# Altium PCB SFCmasterD.PcbDoc (part 3 of 7)
Units mm, origin at the board's own origin, x right, y up, seen from the top; angles counter-clockwise.
Board outline 152.4 x 101.6 mm, 2 copper layers (Top Layer, Bottom Layer); 249 components, 250 nets, 987 pads, 265 vias.
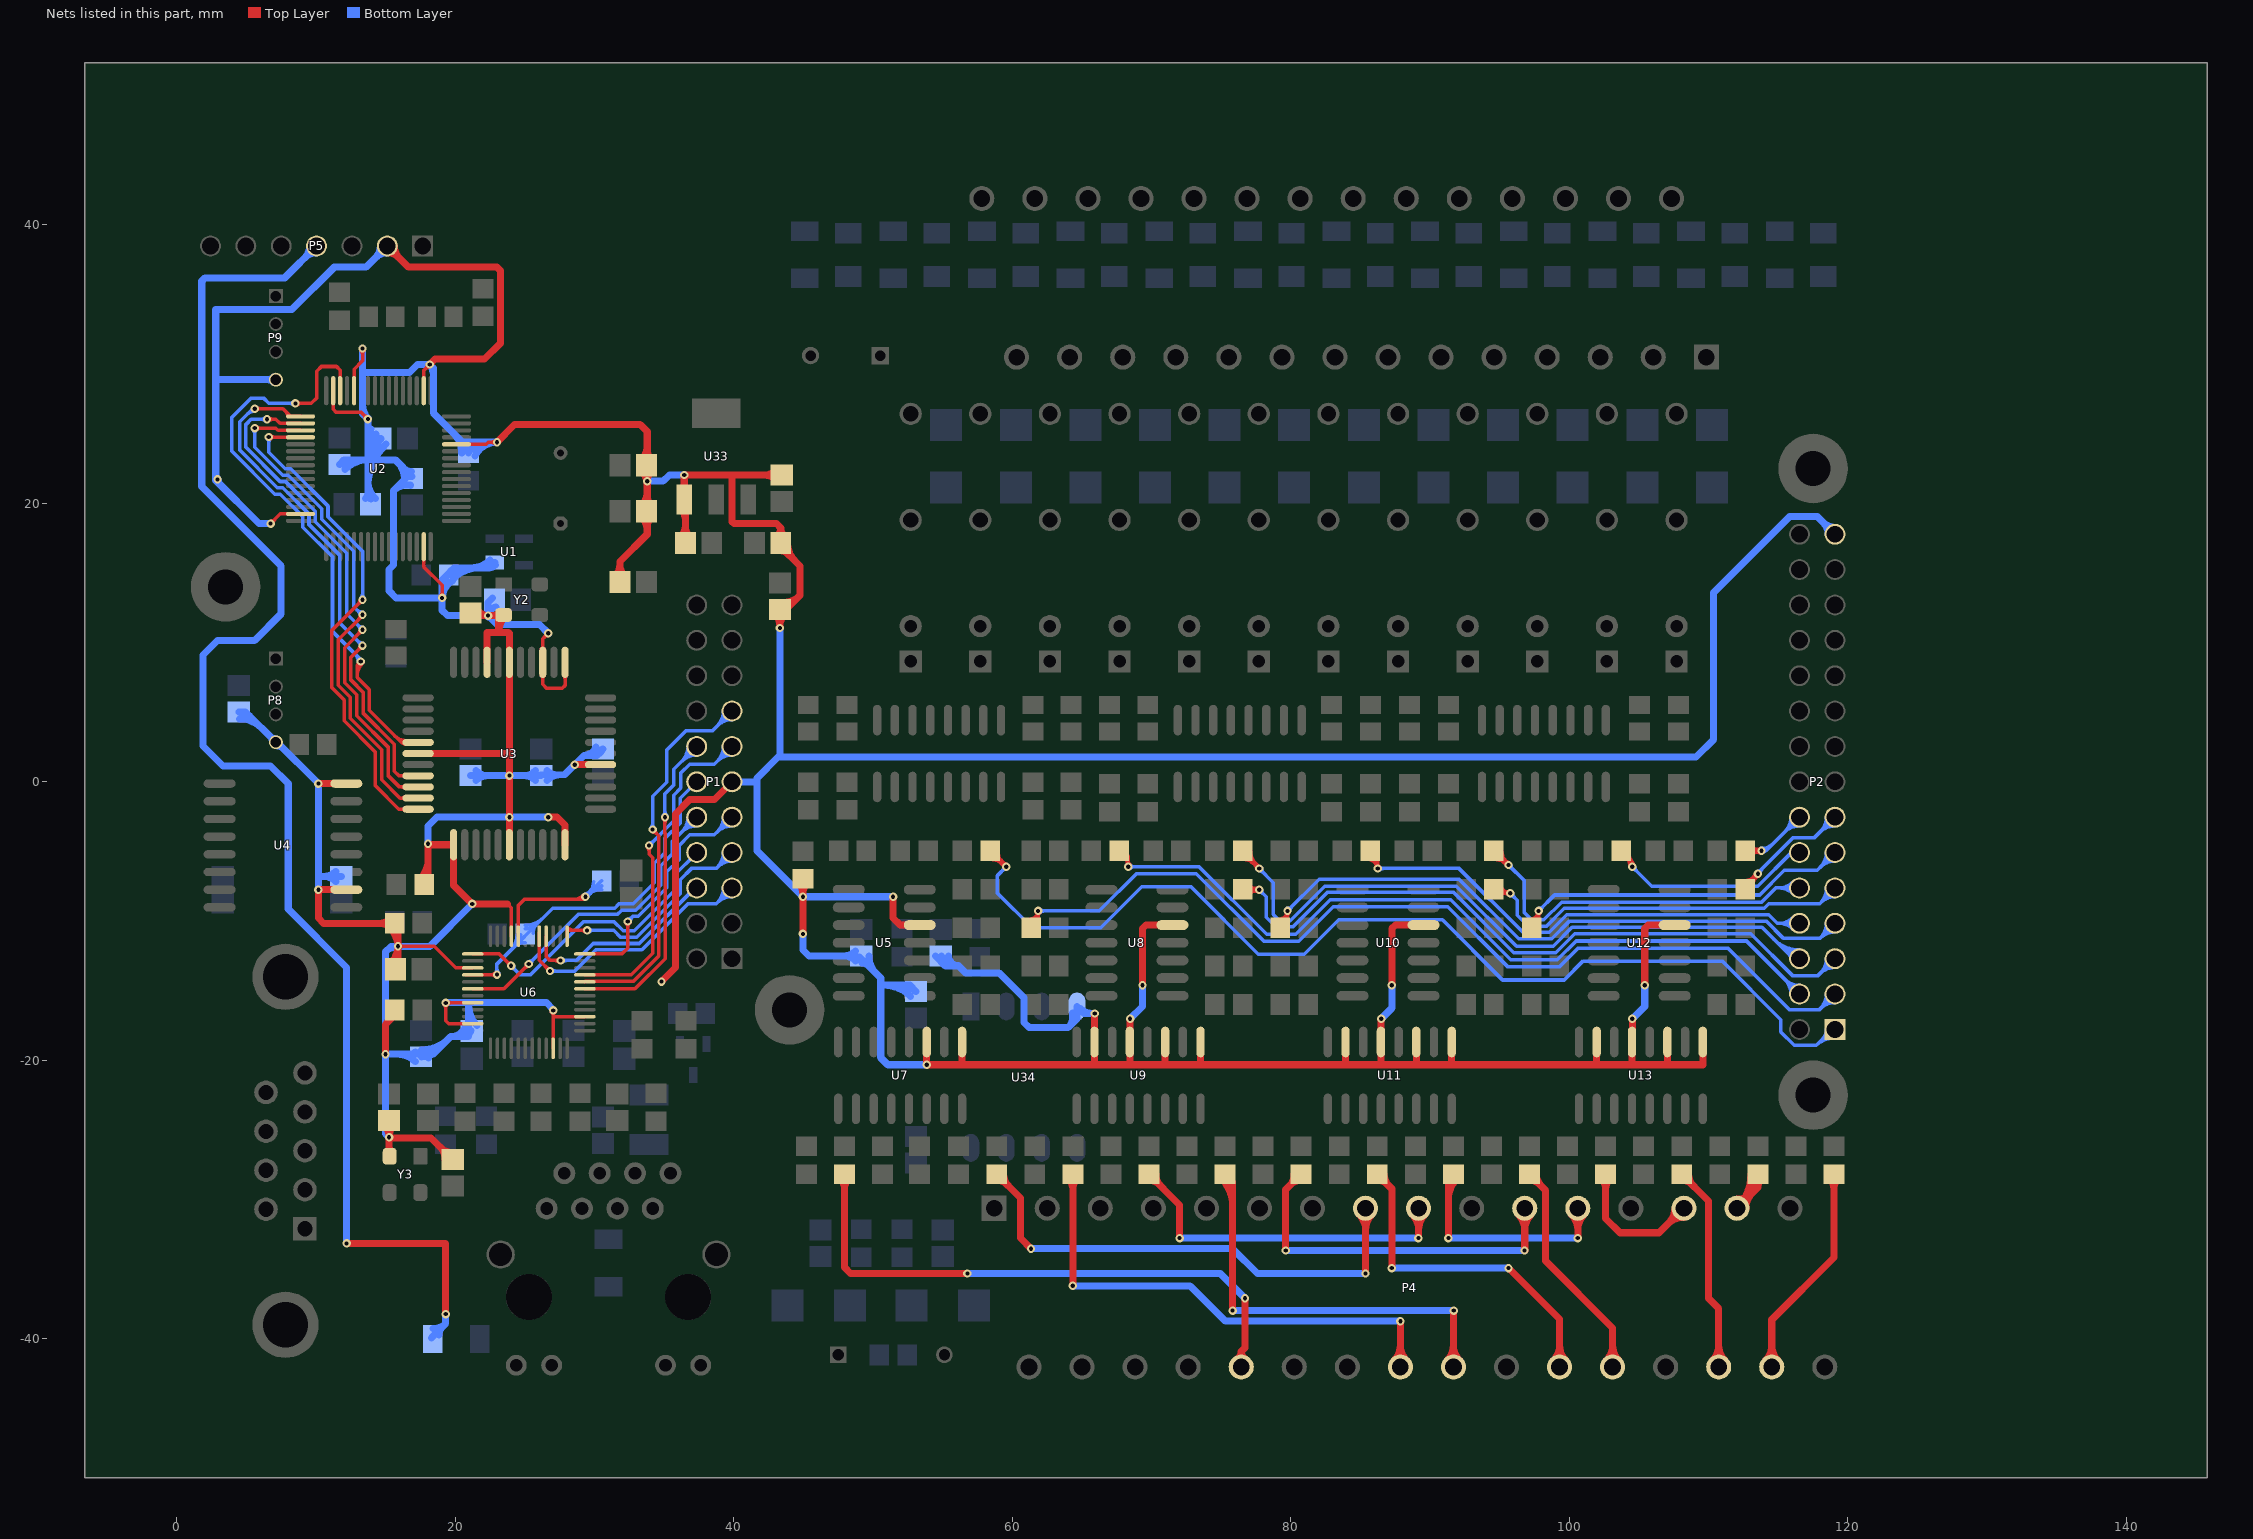
[diagram p3: the nets of this part, all layers, seen from the top]

## Via types
v1: diameter 0.6, hole 0.3, Top Layer to Bottom Layer, 265 vias

## Nets (pads, with @x,y where several pads share a name; then routed paths per layer and width w, separated by ;. In a path a pad name is that pad's centre, name@x,y a point inside that pad or via, vN(x,y) a via of type N, cw(c..) or ccw(c..) an arc to the next point about the centre after c; other vN are vias at no path point) (continued)
DB3: U2.30 U3.16 | length 48.2
  Top Layer w0.254: v1(8.509,27.178) 9.652,27.178 10.033,27.559 10.033,29.474 10.385,29.826 11.458,29.826 11.728,29.556 U2.30@11.728,28.088 ; v1@8.631,27.056 cw(c8.927,26.76) 8.927,27.178 cw(c8.927,27.596) v1@8.631,27.3 ; 12.954,7.605 cw(c14.239,7.605) v1@13.33,8.514 ; 12.954,8.218 cw(c13.626,8.218) v1@13.151,8.693 ; v1@13.036,8.617 cw(c12.752,8.585) 12.954,8.382 ; v1@13.189,8.464 ccw(c13.157,8.18) 12.954,8.382 ; v1(13.208,8.636) 12.954,8.382 ; 15.665,3.286 ccw(c16.455,4.076) U3.16@16.455,2.959 ; 16.099,2.853 ccw(c16.455,3.209) U3.16@16.455,2.705 ; U3.16@16.365,2.742 ccw(c16.148,2.525) 16.148,2.832 ccw(c16.148,3.139) U3.16@16.365,2.922 ; U3.16@17.326,2.832 16.119,2.832 13.824,5.127 13.824,6.625 12.954,7.495 12.954,8.382
  Bottom Layer w0.254: v1@8.387,27.056 ccw(c8.091,26.76) 8.091,27.178 ccw(c8.091,27.596) v1@8.387,27.3 ; v1(8.509,27.178) 6.604,27.178 6.223,27.559 5.334,27.559 3.937,26.162 3.937,23.754 7.033,20.658 7.428,20.658 9.036,19.05 9.036,18.29 11.176,16.15 11.176,10.795 13.335,8.636 v1(13.208,8.636) ; 12.823,9.148 cw(c12.311,8.636) v1@13.035,8.636
DB4: U2.33 U3.19 | length 40.9
  Top Layer w0.254: v1(5.588,26.797) 7.62,26.797 8.128,26.289 8.128,26.238 U2.33@8.878,26.238 ; v1@5.71,26.675 cw(c6.006,26.379) 6.006,26.797 cw(c6.006,27.215) v1@5.71,26.919 ; 7.797,26.62 cw(c7.415,26.238) U2.33@7.955,26.238 ; v1@13.162,9.779 cw(c12.744,9.779) 13.04,9.484 cw(c13.335,9.188) v1@13.335,9.606 ; v1(13.335,9.779) 12.5,8.944 12.5,7.307 13.37,6.437 13.37,4.939 15.621,2.688 15.621,0.762 15.951,0.432 U3.19@17.326,0.432 ; U3.19@16.365,0.342 ccw(c16.148,0.125) 16.148,0.432 ccw(c16.148,0.739) U3.19@16.365,0.522
  Bottom Layer w0.254: 5.068,26.409 cw(c5.588,25.888) v1@5.588,26.624 ; v1(5.588,26.797) 5.456,26.797 4.507,25.848 4.507,23.826 7.221,21.112 7.616,21.112 9.49,19.238 9.49,18.478 11.684,16.284 11.684,11.43 v1(13.335,9.779) ; v1@13.162,9.779 ccw(c12.744,9.779) 13.04,10.074 ccw(c13.335,10.37) v1@13.335,9.952
DB5: U2.34 U3.20 | length 40.5
  Top Layer w0.254: v1(6.477,26.035) 7.112,26.035 7.409,25.738 U2.34@8.878,25.738 ; v1@6.599,25.913 cw(c6.895,25.617) 6.895,26.035 cw(c6.895,26.453) v1@6.599,26.157 ; v1@13.162,10.922 cw(c12.744,10.922) 13.04,10.627 cw(c13.335,10.331) v1@13.335,10.749 ; v1(13.335,10.922) 12.046,9.633 12.046,7.119 12.916,6.249 12.916,4.751 15.167,2.5 15.167,0.454 15.989,-0.368 U3.20@17.326,-0.368 ; U3.20@16.365,-0.458 ccw(c16.148,-0.675) 16.148,-0.368 ccw(c16.148,-0.061) U3.20@16.365,-0.278
  Bottom Layer w0.254: v1@6.355,25.913 ccw(c6.059,25.617) 6.059,26.035 ccw(c6.059,26.453) v1@6.355,26.157 ; v1(6.477,26.035) 5.353,26.035 5.345,26.027 5.328,26.027 4.961,25.66 4.961,24.014 7.409,21.566 7.804,21.566 9.944,19.426 9.944,18.666 12.192,16.418 12.192,12.065 v1(13.335,10.922) ; v1@13.162,10.922 ccw(c12.744,10.922) 13.04,11.217 ccw(c13.335,11.513) v1@13.335,11.095
DB6: U2.35 U3.21 | length 40.4
  Top Layer w0.254: v1(5.588,25.4) 7.105,25.4 7.267,25.238 U2.35@8.878,25.238 ; v1@5.71,25.278 cw(c6.006,24.982) 6.006,25.4 cw(c6.006,25.818) v1@5.71,25.522 ; 12.995,11.598 ccw(c12.591,12.002) v1@13.162,12.002 ; 13.148,11.751 cw(c13.335,11.564) v1@13.335,11.829 ; v1(13.335,12.002) 13.335,11.938 11.592,10.195 11.592,6.931 12.462,6.061 12.462,4.563 14.713,2.312 14.713,0.146 16.027,-1.168 U3.21@17.326,-1.168 ; U3.21@16.365,-1.258 ccw(c16.148,-1.475) 16.148,-1.168 ccw(c16.148,-0.861) U3.21@16.365,-1.078
  Bottom Layer w0.254: v1@5.466,25.278 cw(c5.17,24.982) 5.588,24.982 cw(c6.006,24.982) v1@5.71,25.278 ; v1(5.588,25.4) 5.588,24.029 7.597,22.02 7.992,22.02 10.398,19.614 10.398,18.854 12.7,16.552 12.7,12.573 v1@13.335,11.938 ; 12.931,12.342 ccw(c13.335,12.745) v1@13.335,12.174 ; 13.085,12.188 cw(c12.898,12.002) v1@13.162,12.002
DB7: U2.36 U3.22 | length 39.4
  Top Layer w0.254: v1(6.604,24.765) 6.604,24.774 6.64,24.738 U2.36@8.878,24.738 ; v1@6.726,24.643 cw(c6.958,24.411) 6.958,24.738 ; v1@6.726,24.887 ccw(c7.086,25.247) 7.086,24.738 ; v1@13.162,13.081 cw(c12.744,13.081) 13.04,12.786 cw(c13.335,12.49) v1@13.335,12.908 ; v1(13.335,13.081) 11.138,10.884 11.138,6.743 12.008,5.873 12.008,4.375 14.259,2.124 14.259,-0.289 15.938,-1.968 U3.22@17.326,-1.968 ; U3.22@16.365,-2.058 ccw(c16.148,-2.275) 16.148,-1.968 ccw(c16.148,-1.661) U3.22@16.365,-1.878
  Bottom Layer w0.254: v1@6.482,24.643 cw(c6.186,24.347) 6.604,24.347 cw(c7.022,24.347) v1@6.726,24.643 ; v1(6.604,24.765) 6.604,23.655 7.785,22.474 8.18,22.474 10.852,19.802 10.852,19.042 13.335,16.559 v1(13.335,13.081) ; v1@13.213,13.203 ccw(c12.917,13.499) 13.335,13.499 ccw(c13.753,13.499) v1@13.457,13.203
DETECT_IN1: P2.4 R31.1 | length 65.4
  Top Layer w0.254: R31.1@67.649,-5.322 cw(c67.626,-6.021) v1@68.326,-6.021 ; R31.1@67.657,-5.068 cw(c67.635,-5.759) 68.326,-5.759 ; R31.1@67.659,-4.953 68.326,-5.62 v1(68.326,-6.096) ; R31.1@67.665,-4.814 cw(c67.643,-5.497) R31.1@68.326,-5.497 ; v1@68.187,-5.994 ccw(c67.912,-5.792) 68.241,-5.704 ; v1@68.204,-5.974 ccw(c67.908,-5.678) 68.326,-5.678 ccw(c68.744,-5.678) v1@68.448,-5.974 ; 68.249,-5.733 ccw(c68.588,-5.642) v1@68.413,-5.946
  Bottom Layer w0.254: v1(68.326,-6.096) 73.406,-6.096 78.256,-10.946 80.359,-10.946 82.834,-8.471 91.481,-8.471 95.799,-12.789 99.14,-12.789 100.499,-11.43 112.72,-11.43 P2.4@116.53,-15.24 ; v1@68.448,-6.218 cw(c68.744,-6.514) 68.744,-6.096 cw(c68.744,-5.678) v1@68.448,-5.974 ; P2.4@115.907,-15.24 ccw(c114.403,-15.24) 115.466,-14.176 ccw(c116.53,-13.113) P2.4@116.53,-14.617 ; P2.4@116.161,-15.24 ccw(c115.27,-15.24) 115.9,-14.61 ccw(c116.53,-13.98) P2.4@116.53,-14.871
DETECT_IN2: P2.3 R36.2 | length 75.8
  Top Layer w0.254: R36.2@61.302,-9.856 ccw(c61.263,-9.271) v1(61.849,-9.271) 61.849,-9.97 R36.2@61.341,-10.477 ; R36.2@61.32,-10.109 ccw(c61.281,-9.543) v1@61.849,-9.543 ; R36.2@61.337,-10.363 ccw(c61.3,-9.814) R36.2@61.849,-9.814 ; v1@61.724,-9.39 cw(c61.479,-9.622) 61.804,-9.709 ; v1@61.725,-9.392 cw(c61.597,-9.518) 61.77,-9.564 cw(c61.944,-9.611) v1@61.896,-9.438 ; v1@61.727,-9.393 cw(c61.431,-9.689) 61.849,-9.689 cw(c62.267,-9.689) v1@61.971,-9.393
  Bottom Layer w0.254: v1(61.849,-9.271) 66.243,-9.271 68.91,-6.604 73.217,-6.604 78.067,-11.454 80.57,-11.454 83.045,-8.979 91.27,-8.979 95.588,-13.297 99.274,-13.297 100.633,-11.938 111.379,-11.938 115.824,-16.383 117.927,-16.383 P2.3@119.07,-15.24 ; v1@61.971,-9.393 cw(c62.267,-9.689) 62.267,-9.271 cw(c62.267,-8.853) v1@61.971,-9.149 ; P2.3@118.447,-15.24 cw(c116.943,-15.24) 118.006,-16.304 cw(c119.07,-17.367) P2.3@119.07,-15.863 ; P2.3@118.701,-15.24 cw(c117.81,-15.24) 118.44,-15.87 cw(c119.07,-16.5) P2.3@119.07,-15.609
DETECT_IN3: P2.6 R41.1 | length 57.6
  Top Layer w0.254: R41.1@76.549,-5.576 cw(c76.549,-7.08) v1@77.613,-6.017 ; R41.1@76.549,-5.322 cw(c76.549,-6.213) R41.1@77.179,-5.583 ; R41.1@76.549,-4.953 77.819,-6.223 v1(77.724,-6.223) ; R41.1@77.122,-5.003 ccw(c78.385,-5.003) 77.492,-5.896 ; 77.167,-5.759 cw(c76.748,-6.485) v1@77.557,-6.268 ; 77.361,-5.765 cw(c76.904,-6.223) v1@77.551,-6.223
  Bottom Layer w0.254: v1@77.724,-6.396 cw(c77.724,-6.814) 78.019,-6.518 cw(c78.315,-6.223) v1@77.897,-6.223 ; v1(77.724,-6.223) 78.74,-7.239 78.74,-9.525 79.183,-9.968 79.954,-9.968 82.429,-7.493 91.886,-7.493 96.204,-11.811 98.834,-11.811 100.193,-10.452 113.83,-10.452 116.078,-12.7 P2.6@116.53,-12.7 ; 114.695,-11.317 ccw(c116.53,-9.482) P2.6@116.53,-12.077 ; 115.128,-11.75 ccw(c116.53,-10.349) P2.6@116.53,-12.331 ; 115.562,-12.184 ccw(c116.53,-11.216) P2.6@116.53,-12.585 ; 115.786,-12.408 cw(c115.494,-12.7) P2.6@115.907,-12.7
DETECT_IN4: P2.5 R46.2 | length 57.7
  Top Layer w0.254: R46.2@76.549,-7.715 76.581,-7.747 v1(77.724,-7.747) ; R46.2@76.991,-7.401 ccw(c77.724,-6.798) v1(77.724,-7.747) ; R46.2@77.009,-8.107 cw(c77.724,-8.637) v1(77.724,-7.747) ; v1@77.574,-7.833 ccw(c77.213,-8.042) 77.321,-7.639 ccw(c77.429,-7.235) v1@77.638,-7.597 ; v1@77.574,-7.661 cw(c77.213,-7.452) 77.321,-7.855 cw(c77.429,-8.259) v1@77.638,-7.897 ; v1@77.602,-7.869 ccw(c77.306,-8.165) 77.306,-7.747 ccw(c77.306,-7.329) v1@77.602,-7.625
  Bottom Layer w0.254: v1@77.724,-7.92 cw(c77.724,-8.338) 78.019,-8.042 cw(c78.315,-7.747) v1@77.897,-7.747 ; v1(77.724,-7.747) 78.232,-8.255 78.232,-9.714 78.94,-10.422 80.142,-10.422 82.617,-7.947 91.698,-7.947 96.016,-12.265 99.022,-12.265 100.381,-10.906 113.014,-10.906 116.022,-13.914 117.856,-13.914 P2.5@119.07,-12.7 ; P2.5@118.447,-12.7 cw(c116.943,-12.7) 118.006,-13.764 cw(c119.07,-14.827) P2.5@119.07,-13.323 ; P2.5@118.701,-12.7 cw(c117.81,-12.7) 118.44,-13.33 cw(c119.07,-13.96) P2.5@119.07,-13.069
DETECT_IN5: P2.8 R51.1 | length 43.2
  Top Layer w0.254: R51.1@85.59,-5.567 cw(c85.45,-6.337) v1@86.233,-6.337 ; R51.1@85.636,-5.317 cw(c85.505,-6.033) v1@86.233,-6.033 ; R51.1@85.681,-5.067 cw(c85.561,-5.728) 86.233,-5.728 ; R51.1@85.693,-4.953 86.233,-5.493 v1(86.233,-6.223) ; v1@86.092,-6.123 ccw(c85.727,-5.867) 86.158,-5.751 ; v1@86.111,-6.101 ccw(c85.815,-5.805) 86.233,-5.805 ccw(c86.651,-5.805) v1@86.355,-6.101 ; 86.203,-5.922 ccw(c86.444,-5.857) v1@86.319,-6.073
  Bottom Layer w0.254: v1(86.233,-6.223) 92.075,-6.223 96.666,-10.814 98.547,-10.814 99.817,-9.544 114.319,-9.544 114.935,-10.16 P2.8@116.53,-10.16 ; v1@86.355,-6.345 cw(c86.651,-6.641) 86.651,-6.223 cw(c86.651,-5.805) v1@86.355,-6.101 ; P2.8@116.089,-10.601 ccw(c115.026,-11.664) 115.026,-10.16 ccw(c115.026,-8.656) P2.8@116.089,-9.719 ; P2.8@116.269,-10.421 ccw(c115.639,-11.051) 115.639,-10.16 ccw(c115.639,-9.269) P2.8@116.269,-9.899
DETECT_IN6: P2.7 R68.2 | length 53.3
  Top Layer w0.254: R68.2@79.209,-9.856 ccw(c79.17,-9.271) v1(79.756,-9.271) 79.756,-9.97 R68.2@79.248,-10.477 ; R68.2@79.227,-10.109 ccw(c79.188,-9.543) v1@79.756,-9.543 ; R68.2@79.244,-10.363 ccw(c79.207,-9.814) R68.2@79.756,-9.814 ; v1@79.631,-9.39 cw(c79.386,-9.622) 79.711,-9.709 ; v1@79.632,-9.392 cw(c79.504,-9.518) 79.677,-9.564 cw(c79.851,-9.611) v1@79.803,-9.438 ; v1@79.634,-9.393 cw(c79.338,-9.689) 79.756,-9.689 cw(c80.174,-9.689) v1@79.878,-9.393
  Bottom Layer w0.254: v1(79.756,-9.271) 82.042,-6.985 92.075,-6.985 96.358,-11.268 98.735,-11.268 100.005,-9.998 114.131,-9.998 115.38,-11.247 117.983,-11.247 P2.7@119.07,-10.16 ; v1@79.756,-9.098 ccw(c79.756,-8.68) 80.051,-8.976 ccw(c80.347,-9.271) v1@79.929,-9.271 ; P2.7@118.447,-10.16 cw(c116.943,-10.16) 118.006,-11.224 cw(c119.07,-12.287) P2.7@119.07,-10.783 ; P2.7@118.701,-10.16 cw(c117.81,-10.16) 118.44,-10.79 cw(c119.07,-11.42) P2.7@119.07,-10.529
DETECT_IN7: P2.10 R73.1 | length 35.2
  Top Layer w0.254: R73.1@94.583,-4.953 v1@95.599,-5.969 ; R73.1@94.594,-5.322 cw(c94.621,-6.12) R73.1@95.185,-5.555 ; R73.1@94.602,-5.576 cw(c94.648,-6.92) v1@95.599,-5.969 ; R73.1@95.156,-5.003 ccw(c96.419,-5.003) v1@95.526,-5.896 ; 95.228,-5.755 ccw(c95.464,-5.346) v1@95.586,-5.802 ; R73.1@95.281,-5.651 ccw(c95.631,-5.301) v1@95.631,-5.796 ; 95.295,-5.793 cw(c95.113,-6.108) v1@95.464,-6.014 ; 95.309,-5.521 ccw(c95.832,-5.219) v1@95.676,-5.802 ; 95.358,-5.728 cw(c95.118,-5.969) v1@95.458,-5.969 ; v1(95.631,-5.969) v1@95.599,-5.969
  Bottom Layer w0.254: v1@95.631,-6.142 cw(c95.631,-6.56) 95.926,-6.264 cw(c96.222,-5.969) v1@95.804,-5.969 ; v1(95.631,-5.969) 96.774,-7.112 96.774,-9.398 97.282,-9.906 98.171,-9.906 99.441,-8.636 113.799,-8.636 114.815,-7.62 P2.10@116.53,-7.62 ; P2.10@116.089,-8.061 ccw(c115.026,-9.124) 115.026,-7.62 ccw(c115.026,-6.116) P2.10@116.089,-7.179 ; P2.10@116.269,-7.881 ccw(c115.639,-8.511) 115.639,-7.62 ccw(c115.639,-6.729) P2.10@116.269,-7.359
DETECT_IN8: P2.9 R78.2 | length 34.9
  Top Layer w0.254: R78.2@94.583,-7.715 94.869,-8.001 v1(95.758,-8.001) cw(c95.758,-7.316) R78.2@95.118,-7.561 ; R78.2@94.881,-7.651 ccw(c95.389,-7.457) 95.389,-8.001 ; R78.2@94.988,-8.17 cw(c95.397,-8.579) 95.397,-8.001 ; v1@95.599,-8.069 ccw(c95.344,-8.177) 95.416,-7.909 ccw(c95.487,-7.642) v1@95.654,-7.863 ; v1@95.636,-8.123 ccw(c95.34,-8.419) 95.34,-8.001 ccw(c95.34,-7.583) v1@95.636,-7.879
  Bottom Layer w0.254: v1@95.758,-8.174 cw(c95.758,-8.592) 96.053,-8.296 cw(c96.349,-8.001) v1@95.931,-8.001 ; v1(95.758,-8.001) 96.266,-8.509 96.266,-9.587 97.039,-10.36 98.359,-10.36 99.629,-9.09 113.987,-9.09 114.314,-8.763 117.983,-8.763 ; 118.102,-8.644 cw(c119.07,-9.612) P2.9@119.07,-8.243 ; 118.41,-8.336 ccw(c117.709,-7.634) P2.9@118.701,-7.624 ; P2.9@118.447,-7.626 cw(c116.863,-7.643) 117.983,-8.763 ; 118.536,-8.21 cw(c119.07,-8.745) P2.9@119.07,-7.989 ; P2.9@119.07,-7.62 119.07,-7.676 117.983,-8.763
DETECT_IN9: P2.12 R83.1 | length 19.1
  Top Layer w0.254: R83.1@103.727,-4.953 104.521,-5.747 ; R83.1@103.86,-5.56 cw(c104.024,-6.244) 104.521,-5.747 ; R83.1@103.979,-5.205 cw(c103.088,-6.096) v1@104.348,-6.096 ; R83.1@104.295,-5.079 ccw(c105.084,-5.184) 104.521,-5.747 ; R83.1@104.412,-5.638 cw(c103.955,-6.096) v1@104.602,-6.096 ; v1@104.416,-5.958 ccw(c104.255,-5.747) 104.521,-5.747 ; v1(104.521,-6.096) 104.521,-5.747 ; v1@104.626,-5.958 cw(c104.787,-5.747) 104.521,-5.747
  Bottom Layer w0.254: v1@104.521,-6.269 cw(c104.521,-6.687) 104.816,-6.391 cw(c105.112,-6.096) v1@104.694,-6.096 ; v1(104.521,-6.096) 105.918,-7.493 113.538,-7.493 115.951,-5.08 P2.12@116.53,-5.08
DETECT_IN10: P2.11 R88.2 | length 32.8
  Top Layer w0.254: R88.2@97.243,-9.856 ccw(c97.204,-9.271) v1(97.79,-9.271) 97.79,-9.97 R88.2@97.282,-10.477 ; R88.2@97.261,-10.109 ccw(c97.222,-9.543) v1@97.79,-9.543 ; R88.2@97.278,-10.363 ccw(c97.241,-9.814) R88.2@97.79,-9.814 ; v1@97.665,-9.39 cw(c97.42,-9.622) 97.745,-9.709 ; v1@97.666,-9.392 cw(c97.538,-9.518) 97.711,-9.564 cw(c97.885,-9.611) v1@97.837,-9.438 ; v1@97.668,-9.393 cw(c97.372,-9.689) 97.79,-9.689 cw(c98.208,-9.689) v1@97.912,-9.393
  Bottom Layer w0.254: v1(97.79,-9.271) 98.933,-8.128 113.665,-8.128 115.443,-6.35 117.8,-6.35 P2.11@119.07,-5.08 ; v1@97.79,-9.098 ccw(c97.79,-8.68) 98.085,-8.976 ccw(c98.381,-9.271) v1@97.963,-9.271 ; P2.11@118.447,-5.08 cw(c116.943,-5.08) 118.006,-6.144 cw(c119.07,-7.207) P2.11@119.07,-5.703 ; P2.11@118.701,-5.08 cw(c117.81,-5.08) 118.44,-5.71 cw(c119.07,-6.34) P2.11@119.07,-5.449
DETECT_IN11: P2.14 R93.1 | length 14.1
  Top Layer w0.254: R93.1@112.617,-4.953 v1(113.792,-4.953) ; R93.1@113.069,-5.306 cw(c113.792,-5.871) v1(113.792,-4.953) ; R93.1@113.069,-4.6 ccw(c113.792,-4.035) v1(113.792,-4.953) ; v1@113.642,-5.039 ccw(c113.281,-5.248) 113.389,-4.845 ccw(c113.497,-4.441) v1@113.706,-4.803 ; v1@113.642,-4.867 cw(c113.281,-4.658) 113.389,-5.061 cw(c113.497,-5.465) v1@113.706,-5.103 ; v1@113.67,-5.075 ccw(c113.374,-5.371) 113.374,-4.953 ccw(c113.374,-4.535) v1@113.67,-4.831
  Bottom Layer w0.254: v1@113.792,-5.034 ccw(c113.792,-4.445) 114.209,-4.861 ; v1(113.792,-4.953) 114.117,-4.953 ; v1@113.792,-4.78 ccw(c113.792,-3.578) 114.642,-4.428 ; v1@113.936,-5.05 cw(c114.117,-5.172) 114.117,-4.953 ; v1@113.936,-4.856 ccw(c114.117,-4.734) 114.117,-4.953 ; P2.14@115.907,-2.54 cw(c114.403,-2.54) 115.466,-3.604 cw(c116.53,-4.667) P2.14@116.53,-3.163 ; P2.14@116.161,-2.54 cw(c115.27,-2.54) 115.9,-3.17 cw(c116.53,-3.8) P2.14@116.53,-2.909 ; P2.14@116.53,-2.54 114.117,-4.953
DETECT_IN12: P2.13 R98.2 | length 17.6
  Top Layer w0.254: R98.2@112.617,-7.715 112.617,-7.525 v1(113.538,-6.604) ccw(c114.404,-7.47) R98.2@113.187,-7.603 ; R98.2@112.617,-7.092 ccw(c112.617,-6.048) v1@113.356,-6.786 ; R98.2@112.934,-7.631 cw(c113.729,-7.544) R98.2@113.163,-6.979 ; 113.07,-6.951 ccw(c112.747,-6.392) v1@113.371,-6.559 ; v1@113.365,-6.604 cw(c112.947,-6.604) 113.243,-6.899 cw(c113.538,-7.195) v1@113.538,-6.777 ; v1@113.371,-6.649 cw(c112.968,-6.757) 113.329,-6.966 cw(c113.691,-7.175) v1@113.583,-6.771
  Bottom Layer w0.254: v1(113.538,-6.604) 113.538,-6.549 116.084,-4.003 117.607,-4.003 P2.13@119.07,-2.54 ; v1@113.538,-6.431 ccw(c113.538,-6.146) 113.739,-6.348 ; v1@113.711,-6.604 cw(c114.262,-6.604) 113.872,-6.215 ; P2.13@118.447,-2.54 cw(c116.943,-2.54) 118.006,-3.604 cw(c119.07,-4.667) P2.13@119.07,-3.163 ; P2.13@118.701,-2.54 cw(c117.81,-2.54) 118.44,-3.17 cw(c119.07,-3.8) P2.13@119.07,-2.909
DETECT_PORT1: P4.15 R30.2 | length 40
  Top Layer w0.508: R30.2@58.876,-28.178 60.579,-29.881 60.579,-32.766 v1(61.341,-33.528) ; R30.2@58.926,-28.624 cw(c58.926,-29.58) 59.602,-28.904 ; R30.2@59.372,-28.178 ccw(c60.57,-28.178) 59.723,-29.025 ; P4.15@84.907,-31.079 cw(c83.804,-32.182) 85.364,-32.182 cw(c86.924,-32.182) P4.15@85.821,-31.079 ; v1(85.364,-35.306) P4.15@85.364,-30.622
  Bottom Layer w0.508: v1(61.341,-33.528) 75.819,-33.528 77.597,-35.306 v1(85.364,-35.306)
DETECT_PORT2: P4.16 R35.2 | length 40
  Top Layer w0.508: R35.2@64.027,-28.493 cw(c63.265,-29.255) 64.342,-29.255 cw(c65.419,-29.255) R35.2@64.657,-28.493 ; v1(64.342,-36.195) R35.2@64.342,-28.178 ; P4.16@87.407,-41.565 ccw(c86.304,-40.462) 87.864,-40.462 ccw(c89.424,-40.462) P4.16@88.321,-41.565 ; P4.16@87.864,-42.022 v1(87.864,-38.735)
  Bottom Layer w0.508: v1@64.389,-36.195 72.771,-36.195 75.311,-38.735 v1(87.864,-38.735)
DETECT_PORT3: P4.17 R40.2 | length 28.9
  Top Layer w0.508: R40.2@69.808,-28.178 72.009,-30.379 v1(72.009,-32.766) ; R40.2@69.858,-28.624 cw(c69.858,-29.58) 70.534,-28.904 ; R40.2@70.304,-28.178 ccw(c71.501,-28.178) 70.654,-29.025 ; P4.17@88.717,-31.079 cw(c87.614,-32.182) 89.174,-32.182 cw(c90.734,-32.182) P4.17@89.631,-31.079 ; v1@89.174,-32.766 P4.17@89.174,-30.622
  Bottom Layer w0.508: v1(72.009,-32.766) v1(89.154,-32.766)
DETECT_PORT4: P4.18 R45.2 | length 35.8
  Top Layer w0.508: R45.2@75.008,-28.493 cw(c73.05,-30.451) 75.819,-30.451 ; R45.2@75.273,-28.178 75.819,-28.724 v1(75.819,-37.973) ; R45.2@75.367,-28.134 cw(c74.276,-29.225) 75.819,-29.225 ; P4.18@91.217,-41.565 ccw(c90.114,-40.462) 91.674,-40.462 ccw(c93.234,-40.462) P4.18@92.131,-41.565 ; P4.18@91.674,-42.022 v1@91.674,-37.973
  Bottom Layer w0.508: v1(75.819,-37.973) v1(91.694,-37.973)
DETECT_PORT5: P4.21 R50.2 | length 30.3
  Top Layer w0.508: v1(79.629,-33.655) 79.629,-29.288 R50.2@80.739,-28.178 ; 79.892,-29.025 ccw(c79.046,-28.178) R50.2@80.243,-28.178 ; 80.013,-28.904 cw(c80.689,-29.58) R50.2@80.689,-28.624 ; P4.21@96.337,-31.079 cw(c95.234,-32.182) 96.794,-32.182 cw(c98.354,-32.182) P4.21@97.251,-31.079 ; v1@96.794,-33.655 P4.21@96.794,-30.622
  Bottom Layer w0.508: v1(79.629,-33.655) v1(96.774,-33.655)
DETECT_PORT6: P4.22 R55.2 | length 28.3
  Top Layer w0.508: R55.2@86.205,-28.178 87.249,-29.222 v1(87.249,-34.925) ; R55.2@86.255,-28.624 cw(c86.255,-29.58) 86.931,-28.904 ; R55.2@86.701,-28.178 ccw(c87.898,-28.178) 87.051,-29.025 ; v1(95.631,-34.925) 99.294,-38.588 P4.22@99.294,-42.022 ; P4.22@98.837,-41.565 ccw(c97.734,-40.462) 99.294,-40.462 ccw(c100.854,-40.462) P4.22@99.751,-41.565
  Bottom Layer w0.508: v1(87.249,-34.925) v1(95.631,-34.925)
DETECT_PORT7: P4.23 R72.2 | length 20.3
  Top Layer w0.508: v1(91.313,-32.766) 91.313,-28.535 R72.2@91.67,-28.178 ; 91.313,-29.997 cw(c93.439,-29.997) R72.2@91.936,-28.493 ; P4.23@100.147,-31.079 cw(c99.044,-32.182) 100.604,-32.182 cw(c102.164,-32.182) P4.23@101.061,-31.079 ; v1(100.604,-32.766) P4.23@100.604,-30.622
  Bottom Layer w0.508: v1(91.313,-32.766) v1(100.604,-32.766)
DETECT_PORT8: P4.24 R77.2 | length 20.5
  Top Layer w0.508: R77.2@97.136,-28.178 98.298,-29.34 98.298,-34.417 103.104,-39.223 P4.24@103.104,-42.022 ; R77.2@97.186,-28.624 cw(c97.186,-29.58) 97.862,-28.904 ; R77.2@97.632,-28.178 ccw(c98.83,-28.178) 97.983,-29.025 ; P4.24@102.647,-41.565 ccw(c101.544,-40.462) 103.104,-40.462 ccw(c104.664,-40.462) P4.24@103.561,-41.565
DETECT_PORT9: P4.27 R82.2 | length 14.2
  Top Layer w0.254: P4.27@108.204,-30.642 P4.27@108.224,-30.622
  Top Layer w0.508: R82.2@102.286,-28.493 cw(c101.525,-29.255) 102.602,-29.255 cw(c103.679,-29.255) R82.2@102.917,-28.493 ; R82.2@102.602,-28.178 102.602,-31.355 103.632,-32.385 106.426,-32.385 108.224,-30.587 P4.27@108.224,-30.622 ; 107.061,-31.75 cw(c108.224,-32.912) P4.27@108.224,-31.268 ; 107.146,-31.665 ccw(c106.103,-30.622) P4.27@107.578,-30.622
DETECT_PORT10: P4.28 R87.2 | length 19.1
  Top Layer w0.508: R87.2@108.068,-28.178 109.982,-30.092 109.982,-37.084 110.724,-37.826 P4.28@110.724,-42.022 ; R87.2@108.118,-28.624 cw(c108.118,-29.58) 108.794,-28.904 ; R87.2@108.564,-28.178 ccw(c109.761,-28.178) 108.914,-29.025 ; P4.28@110.267,-41.565 ccw(c109.164,-40.462) 110.724,-40.462 ccw(c112.284,-40.462) P4.28@111.181,-41.565
DETECT_PORT11: P4.29 R92.2 | length 11.4
  Top Layer w0.508: P4.29@112.034,-29.976 ccw(c112.034,-28.416) 113.137,-29.519 ccw(c114.24,-30.622) P4.29@112.68,-30.622 ; 112.894,-29.762 ccw(c111.323,-28.19) R92.2@113.545,-28.178 ; R92.2@113.037,-28.181 cw(c109.612,-28.2) P4.29@112.034,-30.622 113.533,-29.123 ; R92.2@113.25,-28.522 cw(c112.756,-29.123) 113.533,-29.123 ; R92.2@113.533,-28.178 113.533,-29.123 ; R92.2@113.817,-28.522 ccw(c114.311,-29.123) 113.533,-29.123
DETECT_PORT12: P4.30 R97.2 | length 19.8
  Top Layer w0.508: P4.30@114.077,-41.565 ccw(c112.974,-40.462) 114.534,-40.462 ccw(c116.094,-40.462) P4.30@114.991,-41.565 ; P4.30@114.534,-42.022 114.534,-38.628 118.999,-34.163 R97.2@118.999,-28.178 ; R97.2@118.684,-28.493 cw(c117.922,-29.255) 118.999,-29.255 cw(c120.076,-29.255) R97.2@119.314,-28.493
DP_TIM_CAP_IN: P2.1 R14.1 | length 83.7
  Top Layer w0.254: R14.1@58.404,-5.576 cw(c58.404,-7.08) v1@59.468,-6.017 ; R14.1@58.404,-5.322 cw(c58.404,-6.213) R14.1@59.034,-5.583 ; R14.1@58.404,-4.953 59.547,-6.096 v1(59.563,-6.096) ; R14.1@58.977,-5.003 ccw(c60.24,-5.003) v1@59.347,-5.896 ; 59.168,-5.843 cw(c58.923,-6.268) v1@59.396,-6.141 ; 59.174,-5.596 ccw(c59.793,-5.238) v1@59.608,-5.929 ; 59.24,-5.789 ccw(c59.563,-5.467) v1@59.563,-5.923 ; 59.256,-5.894 ccw(c59.429,-5.595) v1@59.518,-5.929 ; 59.279,-5.828 cw(c59.011,-6.096) v1@59.39,-6.096
  Bottom Layer w0.254: v1@59.39,-6.096 cw(c58.972,-6.096) 59.268,-6.391 cw(c59.563,-6.687) v1@59.563,-6.269 ; v1(59.563,-6.096) 58.928,-6.731 58.928,-7.994 58.936,-8.002 58.936,-8.007 61.416,-10.487 66.348,-10.487 69.297,-7.538 72.83,-7.538 77.665,-12.373 80.972,-12.373 83.432,-9.913 90.884,-9.913 95.202,-14.231 99.624,-14.231 100.983,-12.872 110.98,-12.872 115.189,-17.081 115.189,-17.962 116.15,-18.923 117.729,-18.923 ; 118.143,-18.509 cw(c119.015,-19.382) P2.1@119.057,-18.149 ; 118.146,-18.506 ccw(c117.421,-17.78) P2.1@118.447,-17.78 ; P2.1@119.049,-18.403 ccw(c118.988,-20.182) 117.729,-18.923 ; P2.1@119.07,-17.78 118.872,-17.78 117.729,-18.923
DP_TIM_CAP_PORT: P4.10 R13.2 | length 44.4
  Top Layer w0.508: R13.2@47.629,-28.493 cw(c46.868,-29.255) 47.945,-29.255 cw(c49.022,-29.255) R13.2@48.26,-28.493 ; R13.2@47.945,-28.178 47.945,-34.864 48.387,-35.306 v1(56.769,-35.306) ; P4.10@76.116,-41.46 ccw(c75.807,-40.914) 76.434,-40.914 ; P4.10@76.434,-42.022 76.434,-40.914 ; v1(76.708,-37.084) 76.708,-40.64 76.434,-40.914 ; P4.10@76.752,-41.46 cw(c77.061,-40.914) 76.434,-40.914
  Bottom Layer w0.508: v1(56.769,-35.306) 74.93,-35.306 v1(76.708,-37.084)
ETH_PHY_MDIO: P1.7 U6.25 | length 21.3
  Top Layer w0.254: U6.25@28.022,-10.439 ccw(c28.573,-9.888) 28.573,-10.668 ; U6.25@28.023,-11.088 28.023,-10.668 v1(29.464,-10.668) ; v1@29.342,-10.79 ccw(c29.046,-11.086) 29.046,-10.668 ccw(c29.046,-10.25) v1@29.342,-10.546
  Bottom Layer w0.254: v1(29.464,-10.668) 31.369,-10.668 31.858,-11.157 33.025,-11.157 36.141,-8.041 36.141,-7.039 36.957,-6.223 38.727,-6.223 P1.7@39.87,-5.08 ; v1@29.586,-10.79 cw(c29.882,-11.086) 29.882,-10.668 cw(c29.882,-10.25) v1@29.586,-10.546 ; P1.7@39.247,-5.08 cw(c37.743,-5.08) 38.806,-6.144 cw(c39.87,-7.207) P1.7@39.87,-5.703 ; P1.7@39.501,-5.08 cw(c38.61,-5.08) 39.24,-5.71 cw(c39.87,-6.34) P1.7@39.87,-5.449
ETH_PHY_RST: P1.12 R102.1 U6.40 | length 32.7
  Top Layer w0.25: U6.40@20.74,-13.863 v1@22.947,-13.863 ; 22.516,-13.863 ccw(c22.516,-13.372) v1@22.863,-13.719 ; 22.613,-13.863 cw(c22.613,-14.217) v1@22.863,-13.967
  Bottom Layer w0.25: v1@22.863,-13.719 ccw(c22.565,-13.421) 22.987,-13.421 ccw(c23.409,-13.421) v1@23.111,-13.719 ; v1(22.987,-13.843) 22.987,-13.081 26.993,-9.075 31.438,-9.075 31.75,-8.763 32.766,-8.763 34.29,-7.239 34.29,-5.842 35.052,-5.08 35.052,-4.065 36.137,-2.98 36.137,-1.193 P1.12@37.33,0 ; 23.956,-12.112 ccw(c22.815,-10.972) R102.1@24.428,-10.972 ; 24.18,-11.888 cw(c25.003,-12.711) R102.1@25.003,-11.547 ; 24.382,-11.686 ccw(c23.669,-10.972) R102.1@24.678,-10.972 ; R102.1@25.003,-10.547 ccw(c25.003,-9.296) 25.887,-10.181 ; R102.1@25.003,-10.297 ccw(c25.003,-8.443) 26.314,-9.754 ; R102.1@25.578,-10.872 cw(c26.5,-10.872) 25.848,-10.22
ETH_REF_CLK: P1.10 U6.42 | length 27.7
  Top Layer w0.25: U6.42@21.248,-14.863 23.491,-14.863 v1(25.273,-13.081) ; v1@25.098,-13.081 cw(c24.676,-13.081) 24.974,-13.38 cw(c25.273,-13.678) v1@25.273,-13.256
  Bottom Layer w0.25: v1(25.273,-13.081) 28.829,-9.525 31.624,-9.525 31.936,-9.213 32.952,-9.213 34.74,-7.425 34.74,-6.028 35.56,-5.208 35.56,-4.31 P1.10@37.33,-2.54 ; v1@25.273,-12.906 ccw(c25.273,-12.484) 25.572,-12.782 ccw(c25.87,-13.081) v1@25.448,-13.081 ; P1.10@36.705,-2.54 cw(c35.196,-2.54) 36.263,-3.607 cw(c37.33,-4.674) P1.10@37.33,-3.165 ; P1.10@36.955,-2.54 cw(c36.05,-2.54) 36.69,-3.18 cw(c37.33,-3.82) P1.10@37.33,-2.915
ETH_RMII_CRS_DV: P1.8 U6.37 | length 23
  Top Layer w0.254: U6.37@21.248,-12.363 23.158,-12.363 v1@24.13,-13.335 ; v1@23.83,-13.208 ccw(c23.412,-13.208) 23.708,-12.913 ccw(c24.003,-12.617) v1@24.003,-13.035
  Bottom Layer w0.254: v1@24.003,-13.381 cw(c24.003,-13.799) 24.298,-13.503 cw(c24.594,-13.208) v1@24.176,-13.208 ; v1(24.003,-13.208) 24.638,-13.843 25.4,-13.843 29.21,-10.033 31.376,-10.033 32.046,-10.703 32.837,-10.703 35.687,-7.853 35.687,-6.751 37.33,-5.108 P1.8@37.33,-5.08
ETH_RMII_INT: R101.2 U6.32 | length 15
  Top Layer w0.254: U6.32@24.523,-11.088 24.523,-8.878 24.954,-8.447 29.145,-8.447 v1(29.337,-8.255) ; 28.456,-8.447 ccw(c28.456,-7.374) v1@29.215,-8.133 ; 29.069,-8.447 ccw(c29.069,-7.987) v1@29.394,-8.312
  Bottom Layer w0.254: v1@29.21,-8.255 29.353,-8.255 R101.2@30.496,-7.112 ; v1@29.292,-8.088 ccw(c29.107,-7.397) 29.726,-7.755 ; v1@29.337,-8.082 ccw(c29.337,-7.626) 29.66,-7.948 ; v1@29.382,-8.088 ccw(c29.471,-7.754) 29.644,-8.053 ; v1@29.432,-8.176 cw(c30.496,-9.239) R101.2@30.496,-7.735 ; v1@29.504,-8.3 cw(c29.977,-8.427) 29.732,-8.002 ; v1@29.51,-8.255 cw(c29.889,-8.255) 29.621,-7.987 ; v1@29.553,-8.055 ccw(c28.66,-7.162) R101.2@29.923,-7.162 ; R101.2@29.866,-7.742 cw(c30.496,-8.372) R101.2@30.496,-7.481
ETH_RMII_MDC: P1.9 U6.24 | length 22.1
  Top Layer w0.25: U6.24@29.298,-12.363 31.96,-12.363 32.385,-11.938 v1(32.385,-10.033) ; v1@32.261,-10.157 cw(c31.963,-10.455) 32.385,-10.455 cw(c32.807,-10.455) v1@32.509,-10.157
  Bottom Layer w0.254: v1(32.385,-10.033) 32.753,-9.665 33.14,-9.665 35.192,-7.613 35.192,-6.464 36.068,-5.588 36.068,-4.572 36.83,-3.81 38.6,-3.81 P1.9@39.87,-2.54 ; v1@32.385,-9.86 ccw(c32.385,-9.442) 32.68,-9.738 ccw(c32.976,-10.033) v1@32.558,-10.033 ; P1.9@39.247,-2.54 cw(c37.743,-2.54) 38.806,-3.604 cw(c39.87,-4.667) P1.9@39.87,-3.163 ; P1.9@39.501,-2.54 cw(c38.61,-2.54) 39.24,-3.17 cw(c39.87,-3.8) P1.9@39.87,-2.909
ETH_RMII_RXD0: P1.5 U6.29 | length 23.7
  Top Layer w0.254: U6.29@26.023,-10.834 26.023,-12.815 v1(26.797,-13.589) ; v1@26.624,-13.589 ccw(c26.206,-13.589) 26.502,-13.294 ccw(c26.797,-12.998) v1@26.797,-13.416
  Bottom Layer w0.254: v1(26.797,-13.589) 28.575,-13.589 30.099,-12.065 33.401,-12.065 36.703,-8.763 38.727,-8.763 P1.5@39.87,-7.62 ; v1@26.919,-13.711 cw(c27.215,-14.007) 27.215,-13.589 cw(c27.215,-13.171) v1@26.919,-13.467 ; P1.5@39.247,-7.62 cw(c37.743,-7.62) 38.806,-8.684 cw(c39.87,-9.747) P1.5@39.87,-8.243 ; P1.5@39.501,-7.62 cw(c38.61,-7.62) 39.24,-8.25 cw(c39.87,-8.88) P1.5@39.87,-7.989
ETH_RMII_RXD1: P1.6 U6.28 | length 15.9
  Top Layer w0.254: U6.28@26.523,-11.088 26.523,-12.553 26.797,-12.827 v1(27.559,-12.827) ; v1@27.437,-12.949 ccw(c27.141,-13.245) 27.141,-12.827 ccw(c27.141,-12.409) v1@27.437,-12.705
  Bottom Layer w0.254: v1(27.559,-12.827) 28.695,-12.827 29.911,-11.611 33.213,-11.611 37.204,-7.62 P1.6@37.33,-7.62 ; v1@27.681,-12.949 cw(c27.977,-13.245) 27.977,-12.827 cw(c27.977,-12.409) v1@27.681,-12.705
ETH_RMII_TX_EN: P1.13 U6.21 | length 29.1
  Top Layer w0.25: U6.21@29.298,-13.863 32.619,-13.863 34.163,-12.319 34.163,-5.461 33.909,-5.207 v1(33.909,-4.572) ; v1@33.785,-4.696 cw(c33.487,-4.994) 33.909,-4.994 cw(c34.331,-4.994) v1@34.033,-4.696
  Bottom Layer w0.25: v1(33.909,-4.572) 35.687,-2.794 35.687,-0.951 36.195,-0.443 36.195,0.635 36.83,1.27 38.6,1.27 P1.13@39.87,2.54 ; v1@33.909,-4.397 ccw(c33.909,-3.975) 34.208,-4.273 ccw(c34.506,-4.572) v1@34.084,-4.572 ; P1.13@39.245,2.54 cw(c37.736,2.54) 38.803,1.473 cw(c39.87,0.406) P1.13@39.87,1.915 ; P1.13@39.495,2.54 cw(c38.59,2.54) 39.23,1.9 cw(c39.87,1.26) P1.13@39.87,2.165
ETH_RMII_TXD0: P1.15 U6.20 | length 32.4
  Top Layer w0.254: U6.20@29.298,-14.363 29.323,-14.338 32.783,-14.338 34.615,-12.506 34.615,-3.881 v1(34.163,-3.429) ; v1@34.163,-3.602 cw(c34.163,-4.02) 34.458,-3.724 cw(c34.754,-3.429) v1@34.336,-3.429
  Bottom Layer w0.254: v1@34.041,-3.307 ccw(c33.745,-3.011) 34.163,-3.011 ccw(c34.581,-3.011) v1@34.285,-3.307 ; v1(34.163,-3.429) 34.163,-1.038 35.179,-0.022 35.179,2.286 36.576,3.683 38.473,3.683 P1.15@39.87,5.08 ; P1.15@39.247,5.08 cw(c37.743,5.08) 38.806,4.016 cw(c39.87,2.953) P1.15@39.87,4.457 ; P1.15@39.501,5.08 cw(c38.61,5.08) 39.24,4.45 cw(c39.87,3.82) P1.15@39.87,4.711
ETH_RMII_TXD1: P1.14 U6.19 | length 27.9
  Top Layer w0.25: U6.19@29.298,-14.863 32.897,-14.863 35.067,-12.693 35.067,-3.694 35.052,-3.679 v1(35.052,-2.54) ; v1@34.928,-2.664 cw(c34.63,-2.962) 35.052,-2.962 cw(c35.474,-2.962) v1@35.176,-2.664
  Bottom Layer w0.254: v1@34.93,-2.418 ccw(c34.634,-2.122) 35.052,-2.122 ccw(c35.47,-2.122) v1@35.174,-2.418 ; v1(35.052,-2.54) 35.052,-0.868 35.687,-0.233 35.687,0.897 P1.14@37.33,2.54 ; P1.14@36.707,2.54 cw(c35.203,2.54) 36.266,1.476 cw(c37.33,0.413) P1.14@37.33,1.917 ; P1.14@36.961,2.54 cw(c36.07,2.54) 36.7,1.91 cw(c37.33,1.28) P1.14@37.33,2.171
FG: LR1.1 P5.4 | length 108.7
  Top Layer w0.508: v1(12.192,-33.147) 19.304,-33.147 v1(19.304,-38.227)
  Bottom Layer w0.508: P5.4@9.537,38.481 cw(c8.34,38.481) 9.186,37.634 cw(c10.033,36.788) P5.4@10.033,37.985 ; P5.4@10.033,38.481 7.747,36.195 2.032,36.195 1.789,35.952 1.789,21.198 7.493,15.494 7.493,12.065 5.588,10.16 2.921,10.16 1.879,9.118 1.879,2.566 3.302,1.143 6.731,1.143 8.001,-0.127 8.001,-9.144 12.192,-13.335 v1(12.192,-33.147) ; LR1.1@18.288,-39.927 19.304,-38.911 ; LR1.1@18.391,-39.26 ccw(c18.458,-38.065) 19.304,-38.911 ; LR1.1@18.812,-39.705 cw(c19.541,-39.705) LR1.1@19.026,-39.189 ; v1(19.304,-38.227) 19.304,-38.911
GND: C1.1 C2.2 C3.1 C4.2 C5.1 C6.1 C7.1 C8.1 C9.2 C15.2 C16.2 C18.2 C27.2 C28.2 C29.1 C30.1 C31.2 C32.1 C33.1 C34.1 C35.2 C36.1 C38.1 C40.2 C42.2 LR17.2 P1.11 P2.29 P5.2 P8.4 P9.4 R2.2 R5.1 R7.1 R10.2 R134.1 R139.1 U1.1 U2.12 U2.18 U2.28 U2.31 U2.47 U2.63 U3.1 U3.3 U3.6 U3.8 U3.17 U3.23 U3.28 U3.33 U3.38 U4.2 U4.8 U5.12 U6.10 U6.15 U6.33 U6.39 U6.44 U6.47 U7.9 U7.11 U8.12 U9.9 U9.11 U9.13 U9.15 U10.12 U11.9 U11.11 U11.13 U11.15 U12.12 U13.9 U13.11 U13.13 U13.15 U33.1 U34.4 Y2.2 Y3.2 | length 782.8
  Top Layer w0.25: v1(15.875,-11.811) 18.48,-11.811 20.032,-13.363 U6.39@21.248,-13.363 ; v1@15.999,-11.935 cw(c16.297,-12.233) 16.297,-11.811 cw(c16.297,-11.389) v1@15.999,-11.687 ; v1@19.18,-15.999 cw(c18.882,-16.297) 19.304,-16.297 cw(c19.726,-16.297) 19.428,-15.999 cw(c19.755,-16.326) 19.755,-15.863 ; v1@19.428,-15.751 ccw(c19.698,-15.481) 19.698,-15.863 ; U6.47@21.248,-17.363 19.522,-17.363 19.304,-17.145 v1(19.304,-15.875) 19.316,-15.863 U6.44@21.248,-15.863 ; 23.749,-8.763 24.023,-9.037 U6.33@24.023,-11.088 ; v1@26.899,-16.535 cw(c26.601,-16.833) 27.023,-16.833 cw(c27.445,-16.833) v1@27.147,-16.535 ; U6.10@27.023,-19.138 v1(27.023,-16.411) ; 27.023,-16.863 U6.15@29.298,-16.863
  Top Layer w0.254: v1(6.731,18.542) 7.427,19.238 U2.47@8.878,19.238 ; v1@6.731,18.715 ccw(c6.731,19.133) 7.026,18.837 ccw(c7.322,18.542) v1@6.904,18.542 ; U2.31@11.228,28.088 11.228,26.745 11.421,26.552 13.208,26.552 v1(13.716,26.044) ; U2.28@12.728,28.088 12.728,29.619 13.335,30.226 v1(13.335,31.115) ; v1@13.213,30.993 cw(c12.917,30.697) 13.335,30.697 cw(c13.753,30.697) v1@13.457,30.993 ; v1@13.543,26.044 ccw(c13.125,26.044) 13.421,26.34 ccw(c13.716,26.635) v1@13.716,26.217 ; U2.63@17.728,17.578 17.728,15.431 19.05,14.109 v1(19.05,13.208) ; U2.18@17.728,28.088 17.728,29.539 v1(18.161,29.972) ; v1@17.988,29.972 cw(c17.57,29.972) 17.866,29.677 cw(c18.161,29.381) v1@18.161,29.799 ; v1@18.928,13.33 ccw(c18.632,13.626) 19.05,13.626 ccw(c19.468,13.626) v1@19.172,13.33 ; U3.23@19.749,-5.207 U3.23@19.749,-4.762 ; U2.12@20.078,24.238 22.206,24.238 22.352,24.384 v1(22.987,24.384) ; v1@22.865,24.262 ccw(c22.569,23.966) 22.569,24.384 ccw(c22.569,24.802) v1@22.865,24.506 ; U3.3@26.186,7.621 cw(c25.969,7.404) 26.276,7.404 cw(c26.583,7.404) U3.3@26.366,7.621 ; U3.3@26.186,9.543 ccw(c25.969,9.76) 26.276,9.76 ccw(c26.583,9.76) U3.3@26.366,9.543 ; v1@26.497,10.668 cw(c26.079,10.668) 26.375,10.373 cw(c26.67,10.077) v1@26.67,10.495 ; v1(26.67,10.668) 26.276,10.274 U3.3@26.276,8.582 26.276,6.998 26.543,6.731 27.686,6.731 27.876,6.921 U3.1@27.876,8.582 ; U3.1@27.786,7.621 cw(c27.569,7.404) 27.876,7.404 cw(c28.183,7.404) U3.1@27.966,7.621
  Top Layer w0.5: v1(10.16,-0.127) U4.8@12.17,-0.127 ; U4.2@12.17,-7.747 v1(10.16,-7.747) 10.16,-9.779 10.541,-10.16 15.621,-10.16 15.875,-10.414 C15.2@15.875,-13.335 ; C18.2@14.886,-24.672 cw(c14.033,-25.525) 15.24,-25.525 cw(c16.447,-25.525) C18.2@15.594,-24.672 ; v1(14.986,-19.558) 14.986,-17.415 ; Y3.2@15.106,-26.617 ccw(c14.783,-26.294) Y3.2@15.24,-26.294 ; R139.1@15.205,-16.559 cw(c14.373,-16.802) 14.986,-17.415 ; Y3.2@15.24,-26.851 v1(15.24,-25.527) ; 15.24,-26.087 ccw(c15.99,-26.087) Y3.2@15.46,-26.617 ; C18.2@15.24,-24.191 v1(15.24,-25.527) ; R134.1@15.319,-10.528 cw(c13.976,-11.871) v1@15.875,-11.871 ; R134.1@15.319,-10.478 ccw(c14.551,-11.246) 14.551,-10.16 ccw(c14.551,-9.074) R134.1@15.319,-9.842 ; C15.2@15.333,-13.058 ccw(c14.026,-11.751) v1@15.875,-11.751 ; R139.1@15.637,-16.764 14.986,-17.415 ; 15.875,-12.659 ccw(c16.44,-12.659) C15.2@16.041,-13.058 ; U3.17@17.326,2.032 23.876,2.032 ; 18.873,-26.178 cw(c17.934,-27.117) C40.2@19.262,-27.117 ; 18.994,-26.299 ccw(c19.762,-25.531) C40.2@19.762,-26.617 ; C40.2@19.812,-27.117 18.258,-25.563 15.276,-25.563 v1(15.24,-25.527) ; U3.8@22.276,8.582 22.276,10.719 23.825,10.719 23.876,10.668 U3.6@23.876,8.582 U3.28@23.876,-4.518 ; v1(26.67,-2.54) 27.305,-2.54 27.876,-3.111 U3.33@27.876,-4.518 ; v1(28.575,1.232) U3.38@30.426,1.232 ; v1(34.798,-14.351) 35.802,-13.347 35.802,-2.298 36.83,-1.27 38.6,-1.27 P1.11@39.87,0
  Top Layer w0.508: P5.2@15.113,37.985 cw(c15.113,36.788) 15.96,37.634 cw(c16.806,38.481) P5.2@15.609,38.481 ; P5.2@15.113,38.481 16.637,36.957 22.987,36.957 23.241,36.703 23.241,31.496 22.098,30.353 18.542,30.353 v1(18.161,29.972) ; R7.1@17.449,-7.001 ccw(c16.035,-5.587) 18.034,-5.587 ; R7.1@17.637,-7.315 18.034,-6.918 v1(18.034,-4.445) 18.107,-4.518 U3.23@19.876,-4.518 19.876,-7.43 v1(21.209,-8.763) 23.749,-8.763 ; C9.2@21.082,12.131 21.275,11.938 v1(22.352,11.938) ; C9.2@21.483,11.78 cw(c21.864,11.399) C9.2@21.864,11.938 ; C9.2@21.557,12.387 ccw(c22.352,12.867) v1(22.352,11.938) ; 22.667,11.938 ccw(c22.667,12.679) Y2.2@23.191,12.155 ; v1(22.987,24.384) 24.257,25.654 33.274,25.654 33.782,25.146 33.782,17.78 31.816,15.814 C2.2@31.816,14.351 ; 23.114,10.781 cw(c24.565,10.781) Y2.2@23.539,11.807 ; 23.114,10.795 23.114,11.938 v1(22.352,11.938) ; C2.2@31.465,14.752 ccw(c30.619,15.598) 31.816,15.598 ccw(c33.013,15.598) C2.2@32.167,14.752 ; C32.1@33.365,19.03 cw(c32.359,18.024) 33.782,18.024 ; C32.1@33.365,19.832 ccw(c32.359,20.838) 33.782,20.838 ; C33.1@33.365,22.332 cw(c32.359,21.326) v1@33.782,21.326 ; C33.1@33.365,23.134 ccw(c32.359,24.14) 33.782,24.14 ; 33.782,18.343 cw(c34.754,18.343) C32.1@34.067,19.03 ; 33.782,20.519 ccw(c34.754,20.519) C32.1@34.067,19.832 ; v1@33.782,21.645 cw(c34.754,21.645) C33.1@34.067,22.332 ; 33.782,23.821 ccw(c34.754,23.821) C33.1@34.067,23.134 ; C3.1@36.164,17.546 ccw(c35.318,18.392) 36.515,18.392 ccw(c37.712,18.392) C3.1@36.866,17.546 ; U33.1@36.226,19.534 cw(c35.527,18.835) 36.515,18.835 ; U33.1@36.226,21.002 ccw(c35.72,21.508) 36.435,21.508 ccw(c37.15,21.508) U33.1@36.644,21.002 ; C3.1@36.515,17.145 36.515,20.188 U33.1@36.435,20.268 v1(36.435,22.032) 39.878,22.032 ; C36.1@42.956,12.034 cw(c42.11,11.188) 43.307,11.188 cw(c44.504,11.188) C36.1@43.658,12.034 ; C4.2@43.033,21.681 ccw(c42.187,20.835) 42.187,22.032 ccw(c42.187,23.229) C4.2@43.033,22.383 ; C1.1@43.058,17.582 ccw(c42.542,18.227) 43.368,18.227 ; v1(43.307,11.049) C36.1@43.307,12.385 43.754,12.385 44.758,13.389 44.758,15.494 43.368,16.884 C1.1@43.368,17.145 43.368,18.227 ; C1.1@43.368,16.599 cw(c43.368,15.911) C1.1@43.855,16.397 ; C36.1@43.392,12.88 ccw(c43.518,14.629) 44.758,13.389 ; C4.2@43.434,22.032 39.878,22.032 ; C1.1@43.678,17.582 cw(c44.194,18.227) 43.368,18.227 ; C1.1@43.864,17.095 ccw(c45.571,17.095) 44.364,15.888 ; R10.2@44.643,-7.284 cw(c43.881,-8.046) 44.958,-8.046 cw(c46.035,-8.046) R10.2@45.273,-7.284 ; R10.2@44.942,-6.985 R10.2@44.958,-6.969 v1(44.958,-10.922) ; v1(51.435,-8.255) 51.435,-9.779 51.943,-10.287 U5.12@53.35,-10.287 ; U7.11@53.848,-18.682 v1(53.848,-20.32) 56.388,-20.32 ; U7.9@56.388,-18.682 56.388,-20.32 ; v1(65.913,-16.637) 65.893,-16.657 U9.15@65.893,-18.682 65.893,-20.3 65.913,-20.32 ; v1(68.453,-17.018) 68.453,-18.662 U9.13@68.433,-18.682 68.433,-20.3 68.453,-20.32 ; v1(69.342,-14.605) 69.342,-10.541 69.596,-10.287 U8.12@71.495,-10.287 ; U9.11@70.973,-18.682 70.973,-20.3 70.993,-20.32 ; U9.9@73.513,-18.682 73.513,-20.3 73.533,-20.32 ; U11.15@83.927,-18.682 83.927,-20.3 83.947,-20.32 ; v1(86.487,-17.018) 86.487,-18.662 U11.13@86.467,-18.682 86.467,-20.213 86.36,-20.32 ; v1(87.249,-14.605) 87.249,-10.541 87.503,-10.287 U10.12@89.529,-10.287 ; U11.11@89.007,-18.682 89.007,-20.3 89.027,-20.32 ; U11.9@91.547,-18.682 91.547,-20.3 91.567,-20.32 ; U13.15@101.961,-18.682 101.961,-20.213 101.854,-20.32 ; v1(104.521,-17.018) 104.521,-18.662 U13.13@104.501,-18.682 104.501,-20.3 104.521,-20.32 ; v1(105.41,-14.605) 105.41,-10.541 105.664,-10.287 U12.12@107.563,-10.287 ; 107.041,-20.3 U13.11@107.041,-18.682 ; U13.9@109.581,-18.682 109.601,-18.702 109.601,-20.32 104.521,-20.32 ; 39.878,22.032 39.878,18.669 40.005,18.542 43.053,18.542 43.368,18.227 ; 56.388,-20.32 65.913,-20.32 ; 65.913,-20.32 68.453,-20.32 ; 68.453,-20.32 70.993,-20.32 ; 70.993,-20.32 73.533,-20.32 ; 73.533,-20.32 83.947,-20.32 ; 83.947,-20.32 86.36,-20.32 ; 86.36,-20.32 89.027,-20.32 ; 89.027,-20.32 91.567,-20.32 ; 91.567,-20.32 101.854,-20.32 ; 101.854,-20.32 104.521,-20.32
  Bottom Layer w0.5: C6.1@4.445,5.019 4.935,5.019 P8.4@7.112,2.842 ; C6.1@4.495,4.519 cw(c4.495,2.25) 6.1,3.854 ; C6.1@4.495,5.019 cw(c4.495,3.957) 5.246,4.708 ; P8.4@6.862,2.842 ccw(c6.258,2.842) 6.685,3.269 ccw(c7.112,3.696) P8.4@7.112,3.092 ; P8.4@7.112,2.592 cw(c7.112,1.798) 7.674,2.359 ; P8.4@7.191,2.842 v1(10.16,-0.127) v1(10.16,-7.747) ; 14.986,-24.793 ccw(c15.974,-24.793) v1@15.275,-25.492 ; v1(14.986,-19.558) 18.415,-19.558 ; v1(15.24,-25.527) 14.986,-25.273 14.986,-12.192 ; 15.815,-19.558 cw(c15.815,-21.407) C16.2@17.122,-20.1 ; v1@15.872,-11.861 ccw(c15.792,-12.998) 14.986,-12.192 ; 16.723,-19.558 ccw(c16.723,-18.993) C16.2@17.122,-19.392 ; C16.2@17.576,-19.746 ccw(c17.576,-18.174) 18.687,-19.286 ; C16.2@17.576,-19.246 ccw(c17.576,-16.467) 19.541,-18.432 ; C16.2@17.93,-19.392 ccw(c18.329,-18.993) 18.329,-19.558 ; v1(18.034,-4.445) 18.034,-3.175 18.669,-2.54 v1(23.876,-2.54) v1(26.67,-2.54) ; C16.2@18.066,-19.844 cw(c18.415,-19.914) 18.415,-19.558 ; v1@19.304,-15.863 20.955,-15.863 ; LR17.2@20.456,-18.304 ccw(c20.456,-17.557) LR17.2@21.132,-17.875 ; LR17.2@20.679,-17.662 cw(c19.669,-17.188) 19.669,-18.304 ; LR17.2@20.788,-17.507 ccw(c20.386,-17.105) LR17.2@20.955,-17.105 ; 20.955,-16.032 ccw(c23.042,-16.032) LR17.2@21.566,-17.507 ; C35.2@21.082,0.447 C31.2@26.162,0.447 ; v1(21.209,-8.763) 18.161,-11.811 v1(15.875,-11.811) 15.367,-11.811 14.986,-12.192 ; C35.2@21.486,0.093 cw(c22.339,-0.76) 22.339,0.447 cw(c22.339,1.654) C35.2@21.486,0.801 ; C31.2@25.758,0.093 ccw(c24.905,-0.76) 24.905,0.447 ccw(c24.905,1.654) C31.2@25.758,0.801 ; C31.2@26.162,0.508 27.851,0.508 29.248,1.905 ; C31.2@26.566,0.093 cw(c27.566,-0.907) 27.566,0.508 ; C31.2@26.566,0.801 ccw(c27.272,1.507) 27.272,0.508 ; v1@27.023,-16.355 26.531,-15.863 20.955,-15.863 ; C27.2@29.943,1.905 ccw(c29.943,2.553) C27.2@30.557,2.347 ; C27.2@30.083,2.506 cw(c29.248,2.785) 29.248,1.905 ; C27.2@30.607,2.347 30.165,1.905 29.248,1.905 ; P1.11@39.87,0 41.529,0 ; 18.415,-19.558 19.669,-18.304 ; 19.669,-18.304 20.955,-18.304 20.955,-15.863
  Bottom Layer w0.508: 2.794,22.135 ccw(c3.339,22.135) v1@2.954,21.75 ; 2.842,28.877 P9.4@7.112,28.877 ; v1@2.967,21.717 ccw(c3.529,21.717) 3.132,21.32 ; v1(6.731,18.542) 5.909,18.542 2.794,21.657 2.794,33.909 8.255,33.909 11.303,36.957 13.589,36.957 P5.2@15.113,38.481 ; P9.4@6.938,28.703 ccw(c6.518,28.283) 6.518,28.877 ccw(c6.518,29.471) P9.4@6.938,29.051 ; 10.226,-6.797 C42.2@11.811,-6.797 ; C42.2@11.41,-7.148 ccw(c10.564,-7.994) 10.564,-6.797 ccw(c10.564,-5.6) C42.2@11.41,-6.446 ; C7.1@11.684,22.799 12.008,23.123 15.682,23.123 16.891,21.914 16.571,21.914 15.567,20.91 15.567,20.639 15.562,20.634 15.562,15.562 15.24,15.24 15.24,13.716 15.748,13.208 v1(19.05,13.208) ; C7.1@11.726,22.807 cw(c12.488,22.045) 12.488,23.123 ; C7.1@12.085,22.448 cw(c13.715,20.818) 13.715,23.123 ; 13.335,27.075 ccw(c14.747,27.075) v1@13.749,26.077 ; v1(13.335,31.115) 13.335,26.425 v1(13.716,26.044) 13.716,20.517 C38.1@13.937,20.296 ; 13.462,29.402 16.702,29.402 17.272,29.972 v1(18.161,29.972) 18.415,29.718 18.415,26.476 20.507,24.384 ; C38.1@13.553,20.34 ccw(c13.16,20.733) C38.1@13.716,20.733 ; 13.716,21.094 cw(c18.174,21.094) C5.1@15.022,24.247 ; 13.716,21.64 ccw(c15.555,21.64) C38.1@14.255,20.34 ; 13.716,22.321 cw(c16.948,22.321) C5.1@14.663,24.606 ; 13.716,23.547 cw(c15.721,23.547) C5.1@14.303,24.965 ; 13.716,24.774 cw(c14.495,24.774) C5.1@13.944,25.324 ; C5.1@14.265,24.362 ccw(c13.716,23.976) 13.716,24.647 ; C5.1@14.265,24.933 cw(c13.716,25.319) 13.716,24.647 ; P5.2@14.617,38.481 cw(c13.42,38.481) 14.266,37.634 cw(c15.113,36.788) P5.2@15.113,37.985 ; C5.1@14.671,24.647 13.716,24.647 ; 15.567,20.91 cw(c16.544,19.934) C34.1@16.762,21.298 ; 15.869,22.936 cw(c14.72,21.787) C34.1@16.345,21.787 ; C34.1@16.296,22.509 ccw(c16.841,23.054) C34.1@16.841,22.283 ; v1@18.128,29.939 cw(c17.437,29.248) 18.415,29.248 ; v1@19.05,13.134 cw(c20.568,13.134) R5.1@19.775,14.429 ; 19.05,14.041 cw(c20.012,14.041) R5.1@19.51,14.862 ; R5.1@19.415,14.859 19.05,14.494 v1(19.05,13.208) ; R5.1@19.498,14.953 cw(c20.498,13.953) 20.498,15.367 ; R5.1@19.669,15.125 19.911,15.367 22.433,15.367 U1.1@22.826,15.76 ; R5.1@19.857,14.594 cw(c21.724,12.727) 21.724,15.367 ; 19.875,25.016 cw(c18.465,23.606) R2.2@20.459,23.606 ; R2.2@20.495,23.861 cw(c21.342,23.437) 21.342,24.384 ; R2.2@20.546,23.87 ccw(c20.227,24.104) 20.507,24.384 ; R2.2@20.95,23.634 cw(c22.164,23.025) 22.164,24.384 ; 21.133,15.367 ccw(c21.133,17.303) U1.1@22.502,15.934 ; R2.2@21.404,23.406 cw(c22.987,22.613) v1(22.987,24.384) 20.507,24.384 ; v1@22.352,11.85 cw(c23.067,11.85) C8.1@22.909,12.547 ; U1.1@22.36,15.367 ccw(c22.36,16.076) U1.1@22.861,15.575 ; C8.1@22.672,13.208 22.352,12.888 v1(22.352,11.938) ; v1(26.67,10.668) 26.035,11.303 22.987,11.303 v1(22.352,11.938) ; v1(33.782,21.59) 34.925,21.59 35.367,22.032 v1(36.435,22.032) ; 43.307,1.814 v1(43.307,11.049) ; v1(44.958,-10.922) 44.958,-12.065 45.4,-12.507 C29.1@48.768,-12.507 ; C29.1@48.748,-12.858 ccw(c47.902,-13.704) 47.902,-12.507 ccw(c47.902,-11.31) C29.1@48.748,-12.156 ; C29.1@49.022,-12.573 50.546,-14.097 50.546,-14.605 ; C29.1@49.199,-13.003 cw(c49.199,-13.614) C29.1@49.631,-13.182 ; C29.1@49.695,-12.507 ccw(c51.479,-12.507) 50.218,-13.769 ; 50.759,-14.605 cw(c50.759,-17.329) C28.2@52.685,-15.403 ; v1(51.435,-8.255) v1(44.958,-8.255) 41.656,-4.953 41.656,0.254 43.18,1.778 109.093,1.778 110.363,3.048 110.363,13.589 115.824,19.05 117.8,19.05 P2.29@119.07,17.78 ; 51.986,-14.605 cw(c51.986,-16.102) C28.2@53.044,-15.044 ; C28.2@53.086,-15.052 52.639,-14.605 50.546,-14.605 ; v1(53.848,-20.32) 51.054,-20.32 50.546,-19.812 50.546,-14.605 ; C30.1@54.483,-12.507 55.184,-13.208 56.134,-13.208 ; C30.1@54.902,-12.507 ccw(c55.616,-12.494) C30.1@55.616,-13.208 ; C30.1@55.41,-12.498 ccw(c56.134,-12.484) 56.134,-13.208 ; U34.4@64.306,-16.608 cw(c63.218,-16.862) 64.008,-17.653 ; U34.4@64.888,-16.284 ccw(c65.739,-15.433) v1@65.739,-16.637 ; v1(65.913,-16.637) 65.151,-16.637 U34.4@64.643,-16.129 64.643,-17.018 64.008,-17.653 ; v1(68.453,-17.018) 69.342,-16.129 v1(69.342,-14.605) ; v1(86.487,-17.018) 87.249,-16.256 v1(87.249,-14.605) ; v1(104.521,-17.018) 105.41,-16.129 v1(105.41,-14.605) ; P2.29@118.574,17.78 ccw(c117.377,17.78) 118.223,18.627 ccw(c119.07,19.473) P2.29@119.07,18.276 ; v1(19.05,13.208) 19.05,12.319 19.431,11.938 v1(22.352,11.938) ; 56.134,-13.208 56.642,-13.716 59.041,-13.716 60.833,-15.508 60.833,-17.272 61.214,-17.653 64.008,-17.653
  other v1: 23.876,0.447 2.921,21.717